# Altium PCB No_Opto_Flyback.PcbDoc
Units mm, origin at the board's own origin, x right, y up, seen from the top; angles counter-clockwise.
Board outline 22 x 14 mm, 2 copper layers (Top Layer, Bottom Layer); 21 components, 12 nets, 52 pads, 0 vias.
Unrouted connection lines stored in the file: 40.
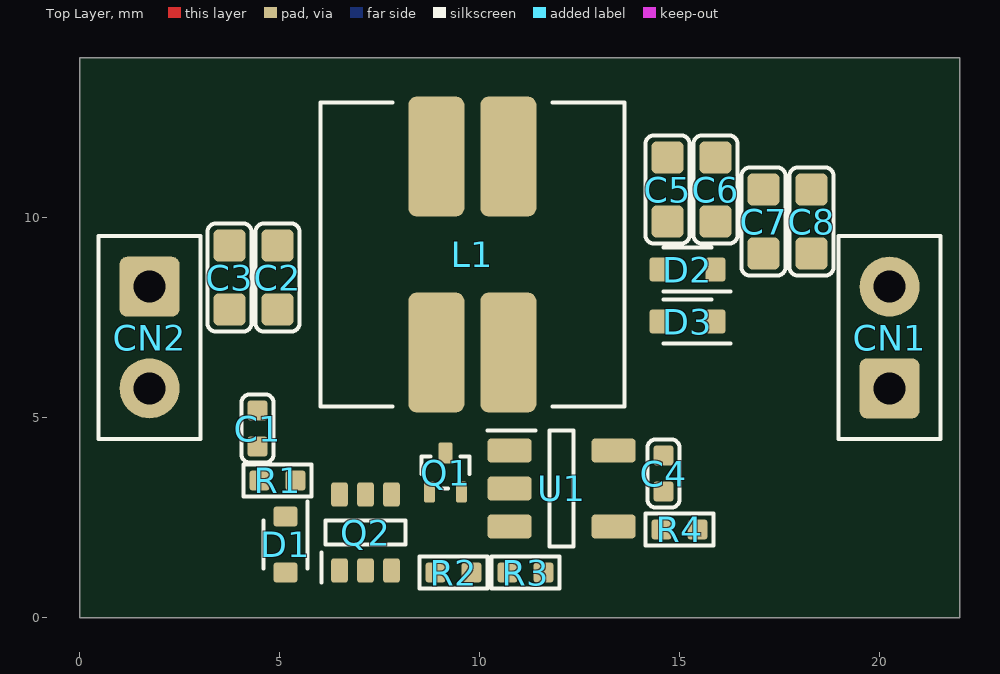
[diagram p0: Top Layer view]
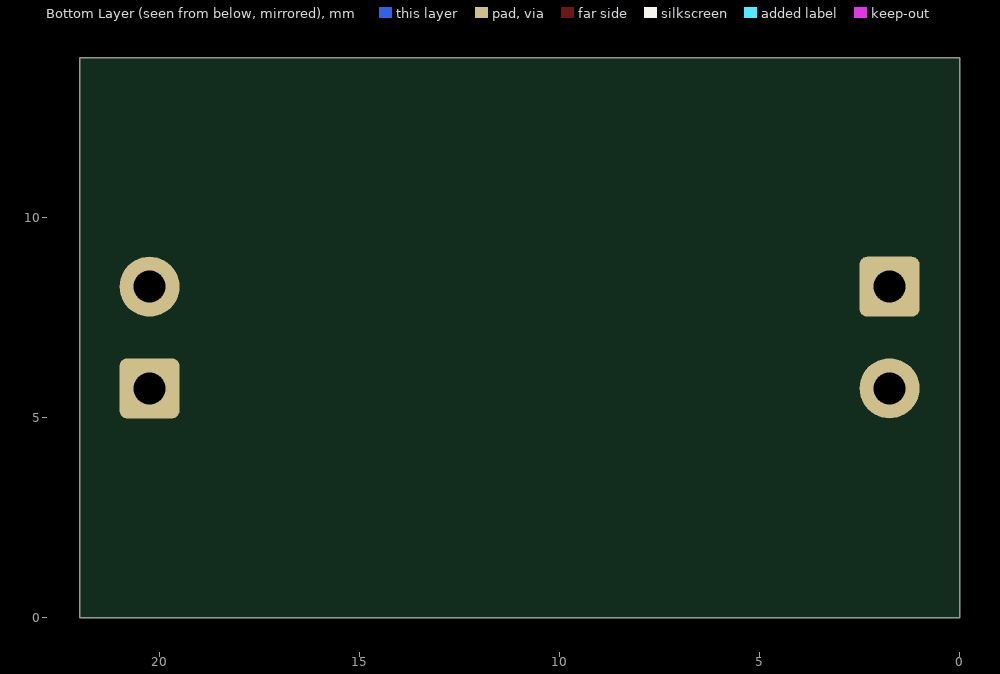
[diagram p1: Bottom Layer view, seen from below]

## Layer stack, top to bottom
Top Solder: solder mask 0.0102, Solder Resist, Dk 3.5
Top Layer: signal copper 0.0356
Dielectric 1: dielectric 0.32, FR-4, Dk 4.8
Bottom Layer: signal copper 0.0356
Bottom Solder: solder mask 0.0102, Solder Resist, Dk 3.5

## Board outline
0,0 0,14 22,14 22,0

## Design rules (kind name [scope] priority, off if disabled: settings)
Clearance [All] p1: gap=0.203 ignorepadtopadclearanceinfootprint=FALSE
PolygonConnect [All] p1: connectstyle=Relief reliefconductorwidth=0.254 reliefentries=4 polygonreliefangle="90 Angle" airgapwidth=0.254
RoutingVias [All] p1: holewidth=0.711 width=1.27 viastyle="Through Hole" minholewidth=0.711 minwidth=1.27 maxholewidth=0.711 maxwidth=1.27
SolderMaskExpansion [All] p1: expansion=0.102 istentingtop=FALSE
Width [All] p1: maxlimit=0.254 minlimit=0.254 preferedwidth=0.254
30 further rules are at their usual default settings.

## Components (designator, comment, footprint, x,y, rotation, side; value= is the part's Value field where it differs from the comment)
C1 "10n" CAP_0402 4.45,4.725 r90 top
C2 "10u" CAP_0603 4.95,8.5 r270 top
C3 "10u" CAP_0603 3.75,8.5 r270 top
C4 "1u" CAP_0402 14.6,3.6 r270 top
C5 "10u" CAP_0603 14.7,10.7 r90 top
C6 "10u" CAP_0603 15.9,10.7 r90 top
C7 "10u" CAP_0603 17.1,9.9 r90 top
C8 "10u" CAP_0603 18.3,9.9 r90 top
CN1 "Header_2.54mm_1x2P_Male_TH" Header_2.54mm_1x2P_Male_TH 20.25,7 r90 top
CN2 "Header_2.54mm_1x2P_Male_TH" Header_2.54mm_1x2P_Male_TH 1.75,7 r270 top
D1 "1N4148WT" SOD-523-2 5.15,1.825 r270 top
D2 "RB521S30T1G" SOD-523-2 15.2,8.7 r180 top
D3 "RB521S30T1G" SOD-523-2 15.2,7.4 r180 top
L1 "SRF0703-100M" SRF0703 9.82,9.075 r0 top
Q1 "TF2123G-E3-AQ3-R" SOT-723-3_120X80X50_40P 9.15,3.625 r0 top
Q2 "MMDT3906" SOT-363-6_215X130X110_65P 7.15,2.125 r0 top
R1 "84K" RES_0402 4.95,3.425 r180 top
R2 "10K" RES_0402 9.35,1.125 r180 top
R3 "10K" RES_0402 11.15,1.125 r180 top
R4 "100K" RES_0402 15,2.2 r0 top
U1 "MT3540" SOT-23-5_290X160X120_95P 12.05,3.225 r0 top

## Footprints (in the part's own frame and the unit in brackets; to place one, negate y for a bottom-side part, rotate by r counter-clockwise, add the part's x,y. Pads: shape width x height; smd on the part's side, far side on the other; paste and mask are expansions set on the pad)
CAP_0402 [mm] "Murata_GRM15_DT0.20mm_aLbBcL"
  rrect30% 0.5x0.5 smd: 1(-0.45,0) 2(0.45,0)
  silkscreen extent -0.85,-0.4 0.85,0.4, body extent -0.5,-0.25 0.5,0.25, height 0.55
CAP_0603 [mm] "Murata_GRM18_DT0.20mm_aMbBcL"
  rrect30% 0.8x0.8 smd: 1(-0.8,0) 2(0.8,0)
  silkscreen extent -1.35,-0.55 1.35,0.55, body extent -0.8,-0.4 0.8,0.4, height 0.9
Header_2.54mm_1x2P_Male_TH [mm] "Header_2.54mm_1x2P_Male_Through_Hole"
  rrect25% 1.5x1.5 hole 0.8: 1(-1.27,0)
  round 1.5 hole 0.8: 2(1.27,0)
  silkscreen extent -2.54,-1.27 2.54,1.27, body extent -2.53,-1.27 2.55,1.27, height 9.5
RES_0402 [mm] "RES_0402"
  rrect30% 0.5x0.5 smd: 1(-0.45,0) 2(0.45,0)
  silkscreen extent -0.85,-0.4 0.85,0.4, body extent -0.5,-0.25 0.5,0.25, height 0.35
SOD-523-2 [mm] "Nexperia_SOD523"
  rrect30% 0.5x0.6 smd paste-0.05 mask+0.05: 1(-0.7,0) 2(0.7,0)
  silkscreen extent -1.07,-0.55 0.6,0.55, body extent -0.8,-0.4 0.8,0.4, height 0.7
SOT-23-5_290X160X120_95P [mm] "TI_TLV74130PDBVR"
  rrect30% 1.1x0.6 smd: 1(-1.3,0.95) 2(-1.3,0) 3(-1.3,-0.95) 4(1.3,-0.95) 5(1.3,0.95)
  silkscreen extent -1.85,-1.45 0.3,1.45, body extent -1.4,-1.45 1.4,1.45, height 1.2
SOT-363-6_215X130X110_65P [mm] "Diodes_74LVC1T45DW-7"
  rrect30% 0.42x0.6 smd mask+0.05: 1(-0.65,-0.95) 2(0,-0.95) 3(0.65,-0.95) 4(0.65,0.95) 5(0,0.95) 6(-0.65,0.95)
  silkscreen extent -1.1,-1.25 1,0.3, body extent -1,-1.05 1,1.05, height 1.1
SOT-723-3_120X80X50_40P [mm] "onsemi_NTK3043NT1G"
  rrect30% 0.27x0.52 smd mask+0.05: 1(-0.4,-0.49) 2(0.4,-0.49)
  rrect30% 0.36x0.52 smd mask+0.05: 3(0,0.49)
  silkscreen extent -0.6,-0.4 0.6,0.4, body extent -0.6,-0.6 0.6,0.6, height 0.51
SRF0703 [mm] "Bourns_SRF0703"
  rrect30% 1.4x3 smd: 1(-0.9,2.45) 2(0.9,2.45) 3(0.9,-2.45) 4(-0.9,-2.45)
  silkscreen extent -3.8,-3.8 3.8,3.8, body extent -3.65,-3.65 3.65,3.65, height 3.4

## Part data
C1 C2 C3 C4 C5 C6 C7 C8: library part Capacitor, "Capacitor", Voltage=V
CN1 CN2: "Header_2.54mm_1x2P_Male / Through-hole"
D1: "Signal Diode"
D2 D3: "Schottky Diode"
L1: Current=A
Q1: "N-JFET"
Q2: "Double PNP"
R1 R2 R3 R4: library part Resistor, "Resistor", Voltage=V
U1: "Asynchronous Boost Convertor / Vin:2.5~5.5V / Vout:Vin~28V"

## Nets (pads, with @x,y where several pads share a name; then routed paths per layer and width w, separated by ;. In a path a pad name is that pad's centre, name@x,y a point inside that pad or via, vN(x,y) a via of type N, cw(c..) or ccw(c..) an arc to the next point about the centre after c; other vN are vias at no path point)
EN: R4.1 U1.4
FB: R2.1 R3.2 U1.3
GND: C1.2 C2.2 C3.2 C4.2 CN2.2 Q1.2 Q1.3 R3.1 U1.2
GND1: C5.2 C6.2 C7.2 C8.2 CN1.2 L1.2
NetC1_1: C1.1 D1.1 R1.2
NetD1_2: D1.2 L1.3 U1.1
NetD2_2: D2.2 D3.2 L1.4
NetQ1_1: Q1.1 Q2.2 Q2.5 Q2.6
NetQ2_3: Q2.3 R2.2
NetQ2_4: Q2.4 R1.1
VCC: C2.1 C3.1 C4.1 CN2.1 L1.1 Q2.1 R4.2 U1.5
VCC1: C5.1 C6.1 C7.1 C8.1 CN1.1 D2.1 D3.1

## Silkscreen, mask and mechanical layers (free items; w line width, h text height)
Board Shape:
  the board outline again, w0.1